# EAGLE board PCB_board (EAGLE 9.7.0)
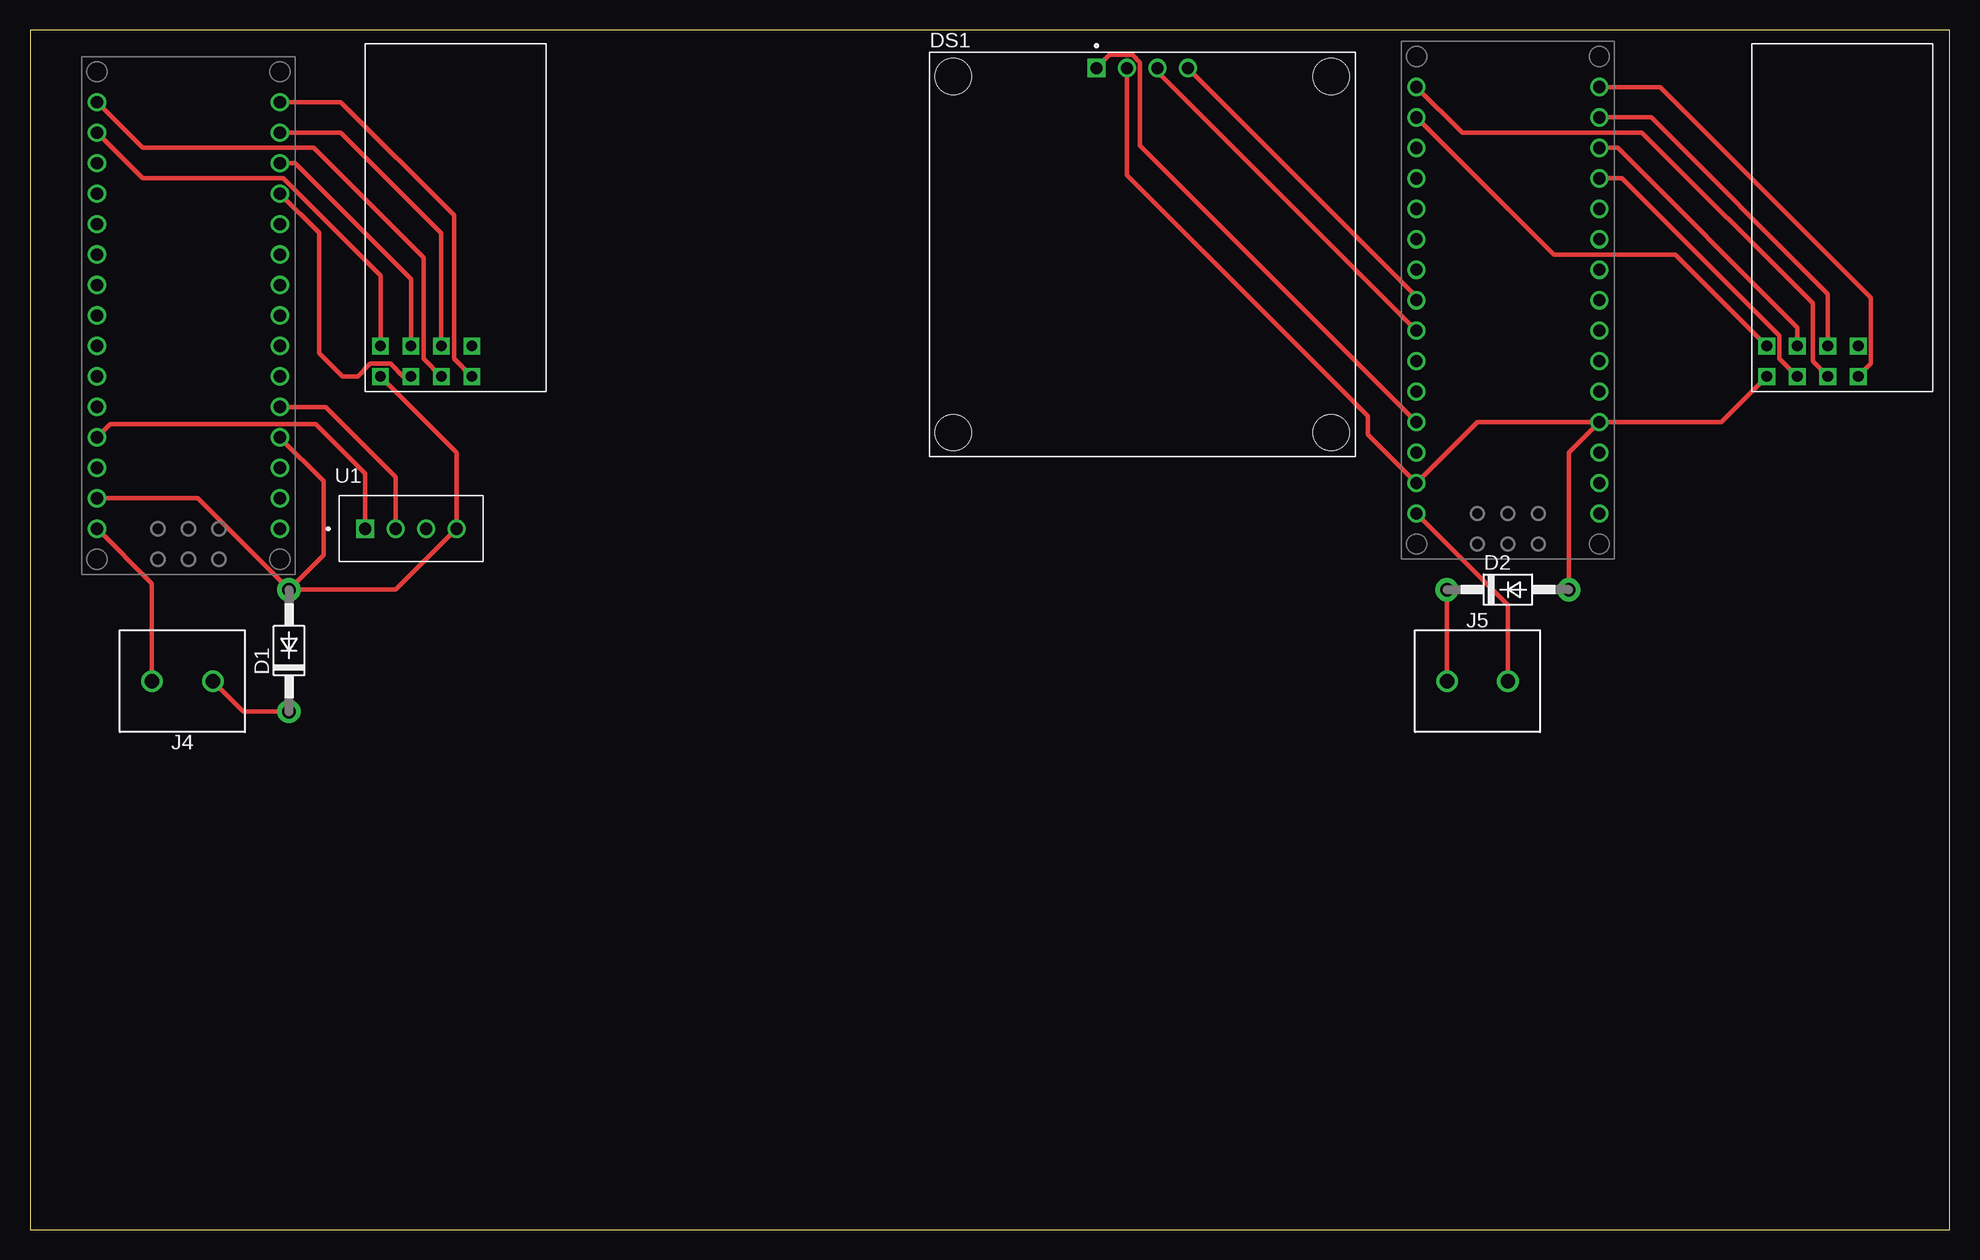
[diagram p0: board, top side]

Size 160 x 100 mm. Coordinates in mm from the lower left corner, seen from the top.
Outline: 0,0 160,0 160,100 0,100 0,0
Copper layers (1*16): Top 0.035mm / dielectric 1.5mm / Bottom 0.035mm
Design rules "Fusion Electronics Design Rules": minimum track width 6mil, minimum drill 0.35mm, track to track 6mil, track to pad 6mil, pad to pad 6mil, via to via 6mil, smd to smd 6mil, copper to edge 40mil, drill to drill 6mil, minimum pad ring 10mil, minimum via ring 8mil, stop-mask expansion 4mil, vias tented up to drill 9999mil, thermal gap 10mil

## Footprints (pad centres in the part's own frame; a part is rotated, then mirrored left to right if it is on the bottom)
DO41-10 = drill 1.118 pad 1.93: A 5.08,0; C -5.08,0
LCD_OLED_128X64_1.3_I2C = drill 1 square: 1 -3.81,15.55 | drill 1: 2 -1.27,15.55; 3 1.27,15.55; 4 3.81,15.55 | hole 3: 15.75,14.85; -15.75,14.85; -15.75,-14.85; 15.75,-14.85
NANO = drill 1.016: 1 -7.62,17.78; 2 -7.62,15.24; 3 -7.62,12.7; 4 -7.62,10.16; 5 -7.62,7.62; 6 -7.62,5.08; 7 -7.62,2.54; 8 -7.62,0; 9 -7.62,-2.54; 10 -7.62,-5.08; 11 -7.62,-7.62; 12 -7.62,-10.16; 13 -7.62,-12.7; 14 -7.62,-15.24; 15 -7.62,-17.78; 16 7.62,-17.78; 17 7.62,-15.24; 18 7.62,-12.7; 19 7.62,-10.16; 20 7.62,-7.62; 21 7.62,-5.08; 22 7.62,-2.54; 23 7.62,0; 24 7.62,2.54; 25 7.62,5.08; 26 7.62,7.62; 27 7.62,10.16; 28 7.62,12.7; 29 7.62,15.24; 30 7.62,17.78
TERMBLK_508-2N = drill 1.2: 1 0,0; 2 5.08,0
XDCR_ADA386 = drill 1.016 square: 1 -3.81,0 | drill 1.016: 2 -1.27,0; 3 1.27,0; 4 3.81,0
NRF24L01-PCB-AERIAL = drill 0.9 square: P$1 -3.81,-1.27; P$2 -3.81,1.27; P$3 -1.27,-1.27; P$4 -1.27,1.27; P$5 1.27,-1.27; P$6 1.27,1.27; P$7 3.81,-1.27; P$8 3.81,1.27

## Placement (x,y rotation side)
D1  1N4004  [DO41-10]  21.59,48.26 90 top
D2  1N4004  [DO41-10]  123.19,53.34 0 top
DS1  OLED_128X64_1.3_I2C  [LCD_OLED_128X64_1.3_I2C]  92.71,81.28 0 top
J2  NANO_FOOTPRINT  [NANO]  13.21,76.2 180 top
J3  NANO_FOOTPRINT  [NANO]  123.19,77.47 180 top
J4  2828XX-2282837-2  [TERMBLK_508-2N]  15.24,45.72 180 top
J5  2828XX-2282837-2  [TERMBLK_508-2N]  118.11,45.72 0 top
U1  ADA386  [XDCR_ADA386]  31.75,58.42 0 top
U3  NRF24L01+-PCB-AERIAL  [NRF24L01-PCB-AERIAL]  33.02,72.39 0 top
U5  NRF24L01+-PCB-AERIAL  [NRF24L01-PCB-AERIAL]  148.59,72.39 0 top

## Library data of the parts
D1 D2 = adafruit
DS1 = OLED_128X64_1.3_I2C; AVAILABILITY: Not in stock; CHECK_PRICES: https://www.snapeda.com/parts/OLED%20128x64%201.3%22%20I2C/UNIVERSAL-SOLDER+Electronics+Ltd/view-part/?ref=eda; DESCRIPTION: Non-Touch Graphic LCD Display Module Transmissive White OLED, Monochrome I2C 1.3 (33.02mm) 128 x 64; MF: UNIVERSAL-SOLDER Electronics Ltd; MP: OLED 128x64 1.3&quot; I2C; PACKAGE: None; PRICE: None; SNAPEDA_LINK: https://www.snapeda.com/parts/OLED%20128x64%201.3%22%20I2C/UNIVERSAL-SOLDER+Electronics+Ltd/view-part/?ref=snap
J2 J3 = SparkFun-Boards
J4 J5 = Connector; CATEGORY: Connectors; DATASHEET: https://www.te.com/usa-en/product-282837-2.datasheet.pdf; DESCRIPTION: 2 Position Wire to Board Terminal Block Horizontal with Board 0.200" (5.08mm) Through Hole; MANUFACTURER: TE Connectivity AMP Connectors; MPN: 282837-2; OPERATING_TEMPERATURE: -40°C ~ 105°C; PACKAGE_SIZE: NA; PACKAGE_TYPE: Through Hole; PART_STATUS: Active; PITCH: 0.200" (5.08mm); ROHS: Compliant; SERIES: Buchanan; SUBCATEGORY: Terminal Blocks; TYPE: Screw Terminal - Rising Cage Clamp Side Wire Entry
U1 = ADA386; AVAILABILITY: Not in stock; CHECK_PRICES: https://www.snapeda.com/parts/ADA386/Adafruit+Industries/view-part/?ref=eda; DESCRIPTION: DHT11 basic temperature-humidity sensor + extras; MF: Adafruit Industries; MP: ADA386; PACKAGE: None; PRICE: None; SNAPEDA_LINK: https://www.snapeda.com/parts/ADA386/Adafruit+Industries/view-part/?ref=snap
U3 U5 = NRF24L01_; AVAILABILITY: In Stock; CHECK_PRICES: https://www.snapeda.com/parts/NRF24L01+/Nordic+Power/view-part/?ref=eda; DESCRIPTION: IC RF TxRx Only General ISM > 1GHz 2.4GHz 20-VFQFN Exposed Pad; MF: Nordic Semiconductor; MP: NRF24L01+; PACKAGE: QFN-20 Nordic Semiconductor; PRICE: None; SNAPEDA_LINK: https://www.snapeda.com/parts/NRF24L01+/Nordic+Power/view-part/?ref=snap

## Nets
N$1: D1.A J2.4 J2.29 U1.4 U3.P$1
N$2: J2.5 U1.2
N$3: J2.17 U3.P$2
N$4: J2.12 U3.P$3
N$5: J2.13 U3.P$4
N$6: J2.16 U3.P$5
N$7: J2.14 U3.P$6
N$8: J2.15 U3.P$7
N$9: D2.A DS1.2 J3.4 J3.29 U5.P$1
N$10: DS1.1 J3.27
N$11: J3.17 U5.P$2
N$12: J3.12 U5.P$3
N$13: J3.13 U5.P$4
N$14: J3.16 U5.P$5
N$15: J3.14 U5.P$6
N$16: J3.15 U5.P$7
N$17: DS1.3 J3.24
N$18: DS1.4 J3.23
N$19: J2.27 U1.1
N$20: D1.C J4.1
N$21: J2.30 J4.2
N$22: D2.C J5.1
N$23: J3.30 J5.2

## Tracks (layer width: path | path; a pad name or v marks a point on that pad's centre or on a via)
N$1
  Top 0.381: D1.A 13.97,60.96 J2.29 | U3.P$1 35.56,64.77 U1.4 30.48,53.34 D1.A | D1.A 24.47,56.22 24.47,62.4 J2.4
N$2
  Top 0.381: U1.2 30.48,62.74 24.64,68.58 J2.5
N$3
  Top 0.381: U3.P$2 29.21,79.54 21.12,87.63 9.4,87.63 J2.17
N$4
  Top 0.381: J2.12 24.1,83.09 24.1,73.07 26.05,71.12 27.32,71.12 28.36,72.17 30.06,72.17 31.1,71.12 U3.P$3
N$5
  Top 0.381: J2.13 22.1,88.9 31.75,79.25 U3.P$4
N$6
  Top 0.381: J2.16 9.4,90.17 23.66,90.17 32.8,81.03 32.8,72.61 U3.P$5
N$7
  Top 0.381: J2.14 25.91,91.44 34.29,83.06 U3.P$6
N$8
  Top 0.381: J2.15 25.91,93.98 35.34,84.55 35.34,72.61 U3.P$7
N$9
  Top 0.381: J3.4 128.27,64.77 D2.A | U5.P$1 140.97,67.31 J3.4 | DS1.2 91.44,87.91 111.53,67.81 111.53,66.27 J3.29 120.65,67.31 J3.4
N$10
  Top 0.381: DS1.1 90,97.93 91.89,97.93 92.54,97.28 92.54,90.34 J3.27
N$11
  Top 0.381: U5.P$2 137.16,81.28 127,81.28 J3.17
N$12
  Top 0.381: J3.12 132.7,87.63 145.83,74.51 145.83,72.61 U5.P$3
N$13
  Top 0.381: U5.P$4 147.32,75.2 132.35,90.17 J3.13
N$14
  Top 0.381: U5.P$5 148.59,72.39 148.59,77.22 134.37,91.44 119.38,91.44 J3.16
N$15
  Top 0.381: U5.P$6 149.86,77.98 135.13,92.71 J3.14
N$16
  Top 0.381: U5.P$7 153.45,72.17 153.45,77.69 135.88,95.25 J3.15
N$17
  Top 0.381: DS1.3 93.98,96.52 J3.24
N$18
  Top 0.381: DS1.4 115.57,77.78 J3.23
N$19
  Top 0.381: U1.1 27.94,63.03 23.83,67.15 6.69,67.15 J2.27
N$20
  Top 0.381: D1.C 17.78,43.18 J4.1
N$21
  Top 0.381: J2.30 10.16,53.85 J4.2
N$22
  Top 0.381: D2.C J5.1
N$23
  Top 0.381: J3.30 123.19,52.07 J5.2